# Altium PCB R45_PCBM.PcbDoc (part 4 of 8)
Units mm, origin at the board's own origin, x right, y up, seen from the top; angles counter-clockwise.
Board outline 109 x 109 mm, 4 copper layers (Top Layer, Layer 1, Layer 2, Bottom Layer), stack 0.98 mm thick; 9 components, 0 nets, 14 pads, 1504 vias.
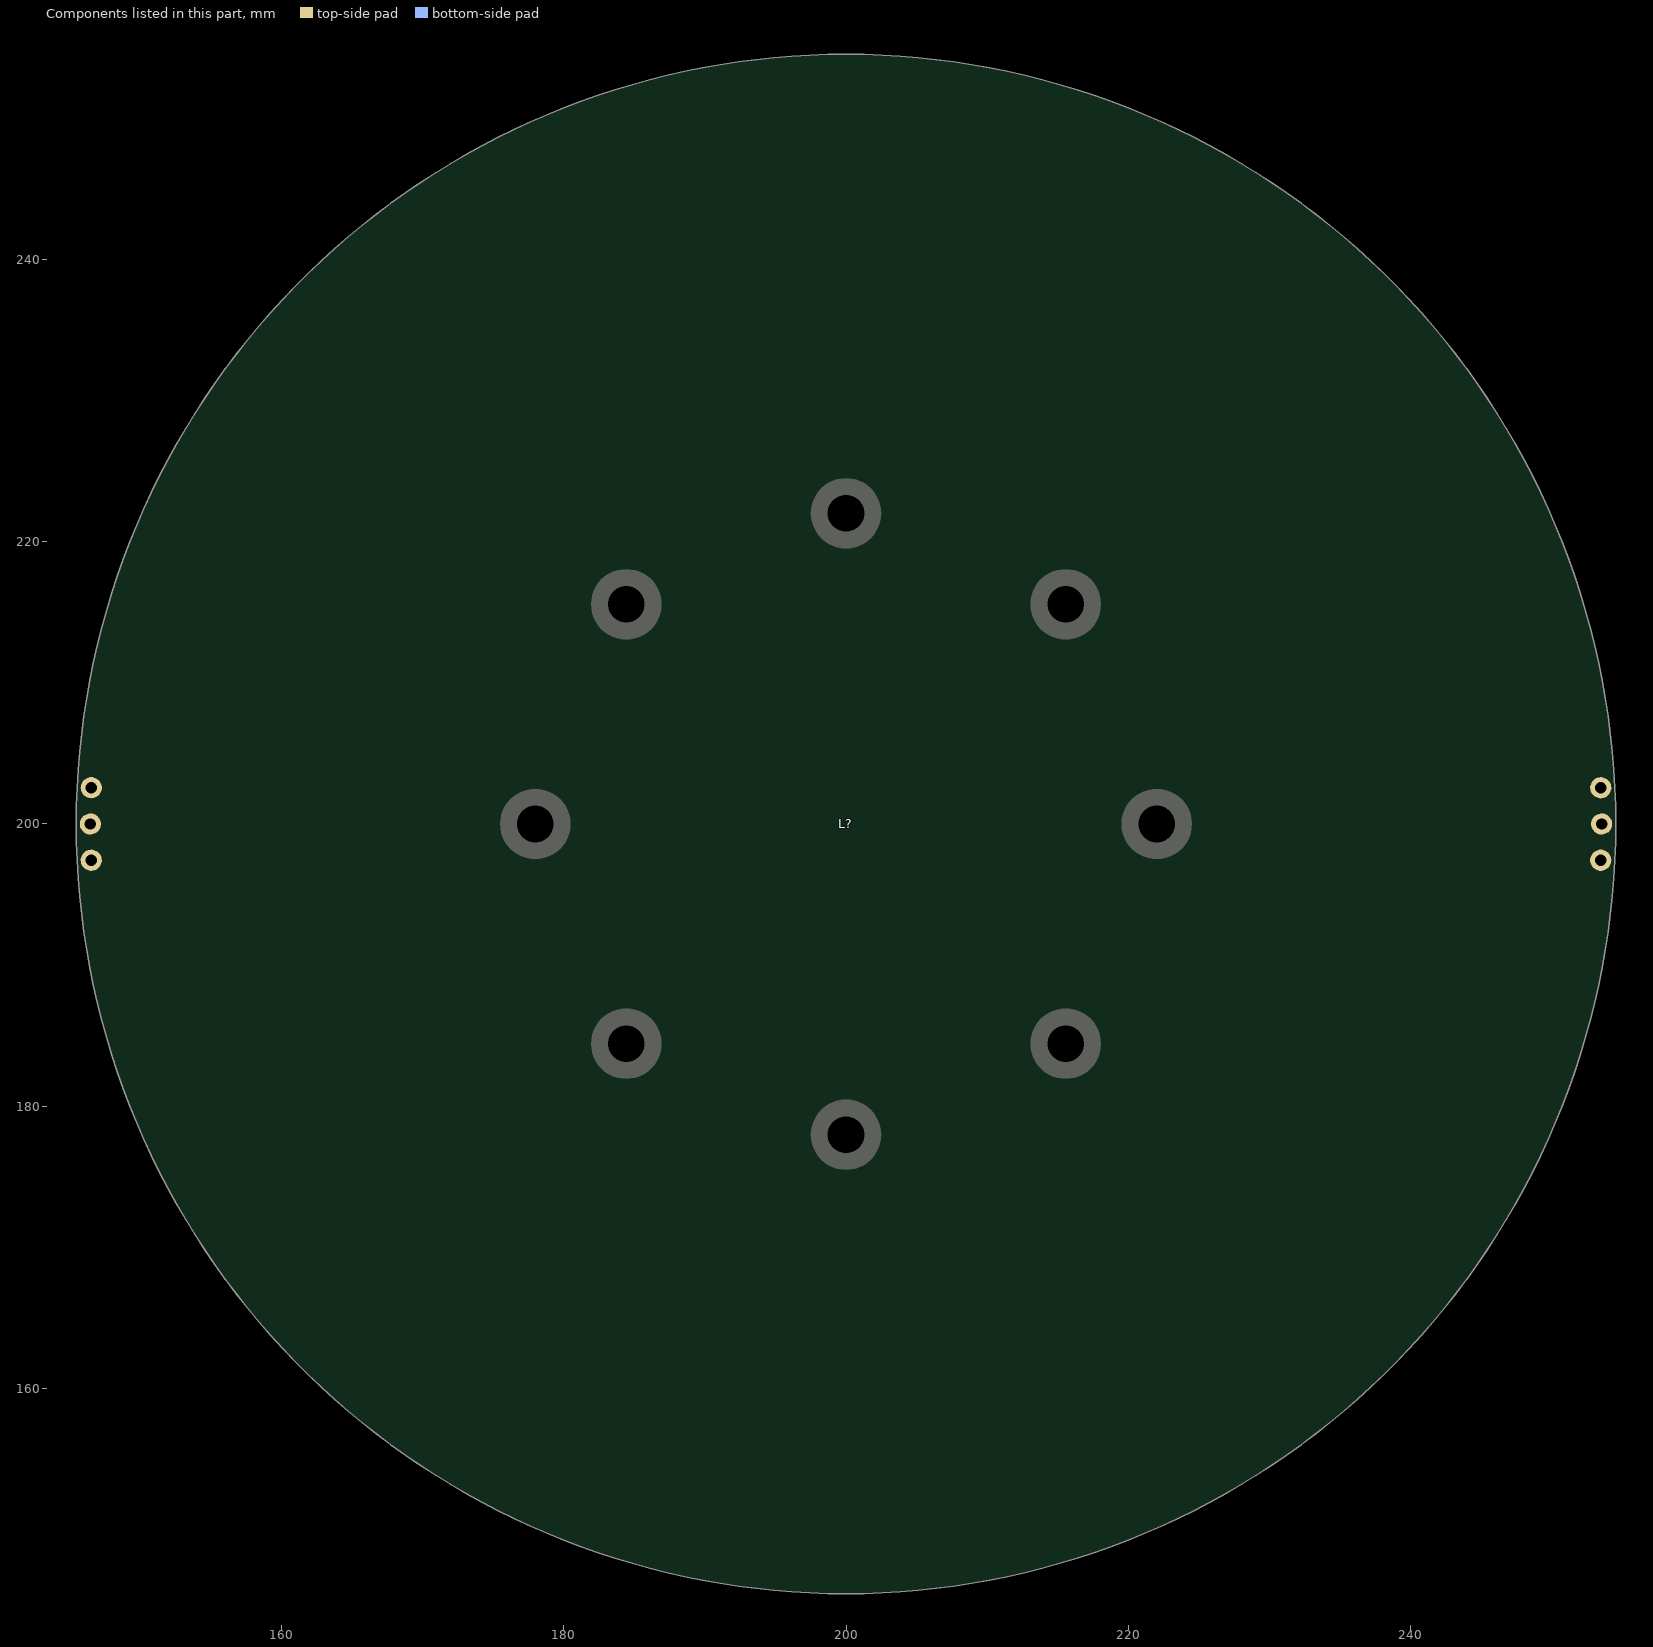
[diagram p6: the components of this part, seen from the top]

## Footprints (in the part's own frame and the unit in brackets; to place one, negate y for a bottom-side part, rotate by r counter-clockwise, add the part's x,y. Pads: shape width x height; smd on the part's side, far side on the other; paste and mask are expansions set on the pad) (continued)
R45_stator [mm] (continued)
  Layer 1 region: 2.938,-48.817 2.88,-48.809 2.829,-48.779 2.794,-48.732 2.779,-48.675 2.779,-48.675 1.645,-26.922 1.659,-26.851 1.705,-26.795 1.771,-26.766 1.771,-26.766 6.587,-26.004 6.659,-26.01 6.72,-26.05 6.755,-26.113 6.755,-26.113 11.645,-44.344 11.649,-44.403 11.63,-44.459 11.59,-44.503 11.537,-44.528 11.537,-44.528 10.718,-44.732 10.659,-44.735 10.604,-44.714 10.56,-44.674 10.536,-44.62 10.536,-44.62 6.751,-28.203 6.676,-28.037 6.543,-27.913 6.373,-27.848 6.191,-27.854 6.191,-27.854 5.987,-27.859 5.798,-27.784 5.652,-27.642 5.574,-27.453 5.574,-27.453 5.561,-27.385 5.495,-27.248 5.371,-27.161 5.22,-27.146 5.22,-27.146 3.424,-27.43 3.285,-27.491 3.194,-27.612 3.174,-27.763 3.174,-27.763 3.182,-27.832 3.166,-28.035 3.072,-28.216 2.915,-28.346 2.719,-28.404 2.719,-28.404 2.544,-28.454 2.402,-28.568 2.315,-28.728 2.295,-28.909 2.295,-28.909 3.922,-47.441 3.954,-47.554 4.028,-47.645 4.131,-47.701 4.247,-47.714 4.247,-47.714 6.667,-47.436 9.069,-47.036 9.069,-47.036 9.178,-46.992 9.261,-46.91 9.306,-46.802 9.307,-46.684 9.307,-46.684 5.79,-28.566 5.796,-28.49 5.838,-28.426 5.906,-28.391 5.906,-28.391 6.152,-28.339 6.229,-28.343 6.293,-28.384 6.329,-28.452 6.329,-28.452 10.745,-47.555 10.747,-47.614 10.726,-47.669 10.686,-47.712 10.632,-47.736 10.632,-47.736 6.806,-48.429 2.938,-48.817
  Layer 1 region: 4.511,-47.206 4.452,-47.2 4.401,-47.172 4.364,-47.126 4.347,-47.07 4.347,-47.07 2.773,-29.015 2.786,-28.94 2.835,-28.88 2.906,-28.853 2.906,-28.853 3.156,-28.827 3.232,-28.839 3.292,-28.886 3.321,-28.958 3.321,-28.958 5.399,-45.849 5.436,-45.96 5.513,-46.049 5.617,-46.101 5.734,-46.11 5.734,-46.11 6.467,-46.013 7.198,-45.904 7.198,-45.904 7.308,-45.864 7.394,-45.784 7.443,-45.678 7.447,-45.561 7.447,-45.561 4.79,-28.754 4.77,-28.699 4.73,-28.656 4.677,-28.631 4.619,-28.629 4.619,-28.629 4.454,-28.655 4.399,-28.675 4.356,-28.715 4.332,-28.768 4.33,-28.827 4.33,-28.827 6.946,-45.318 6.944,-45.377 6.919,-45.431 6.875,-45.47 6.819,-45.49 6.819,-45.49 5.984,-45.607 5.925,-45.604 5.872,-45.578 5.833,-45.533 5.814,-45.477 5.814,-45.477 3.673,-28 3.683,-27.925 3.729,-27.864 3.799,-27.834 3.799,-27.833 4.988,-27.645 5.064,-27.653 5.126,-27.696 5.159,-27.765 5.159,-27.765 8.795,-46.445 8.795,-46.503 8.772,-46.558 8.73,-46.599 8.676,-46.621 8.676,-46.621 6.6,-46.96 4.511,-47.206
  Layer 1 region: 47.272,-3.755 47.256,-3.812 47.219,-3.858 47.168,-3.886 47.109,-3.893 47.109,-3.893 29.056,-2.308 28.984,-2.282 28.934,-2.223 28.919,-2.148 28.919,-2.148 28.937,-1.898 28.962,-1.825 29.019,-1.774 29.094,-1.758 29.094,-1.758 46.09,-2.644 46.206,-2.627 46.306,-2.567 46.376,-2.473 46.405,-2.36 46.405,-2.36 46.437,-1.622 46.457,-0.883 46.457,-0.883 46.436,-0.768 46.373,-0.669 46.276,-0.602 46.162,-0.577 46.162,-0.577 29.149,-0.276 29.091,-0.286 29.042,-0.318 29.009,-0.366 28.996,-0.423 28.996,-0.423 28.993,-0.589 29.004,-0.647 29.035,-0.696 29.083,-0.73 29.141,-0.742 29.141,-0.742 45.836,-1.029 45.894,-1.041 45.942,-1.075 45.973,-1.125 45.983,-1.184 45.983,-1.184 45.954,-2.027 45.94,-2.084 45.905,-2.132 45.854,-2.163 45.796,-2.171 45.796,-2.171 28.212,-1.245 28.14,-1.222 28.088,-1.166 28.07,-1.092 28.07,-1.092 28.091,0.112 28.112,0.185 28.165,0.239 28.239,0.259 28.239,0.259 47.266,0.597 47.324,0.586 47.374,0.554 47.407,0.506 47.419,0.448 47.419,0.448 47.392,-1.655 47.272,-3.755
  Layer 1 region: 48.585,-5.584 48.567,-5.64 48.529,-5.685 48.477,-5.711 48.418,-5.716 48.418,-5.716 26.799,-3.055 26.731,-3.029 26.684,-2.974 26.667,-2.903 26.667,-2.903 26.753,1.971 26.771,2.041 26.821,2.094 26.889,2.118 26.889,2.118 45.692,3.768 45.751,3.762 45.803,3.733 45.839,3.686 45.855,3.629 45.855,3.629 45.914,2.788 45.906,2.729 45.876,2.678 45.829,2.642 45.772,2.628 45.772,2.628 28.947,1.751 28.771,1.706 28.625,1.597 28.532,1.44 28.506,1.26 28.506,1.26 28.475,1.059 28.369,0.885 28.203,0.766 28.004,0.722 28.004,0.722 27.935,0.721 27.788,0.68 27.681,0.573 27.64,0.427 27.64,0.427 27.608,-1.391 27.644,-1.539 27.748,-1.65 27.892,-1.696 27.892,-1.696 27.962,-1.699 28.159,-1.75 28.321,-1.874 28.421,-2.052 28.444,-2.254 28.444,-2.254 28.464,-2.435 28.552,-2.595 28.694,-2.709 28.868,-2.76 28.868,-2.76 47.402,-4.376 47.518,-4.363 47.621,-4.307 47.694,-4.215 47.727,-4.103 47.727,-4.103 47.873,-1.672 47.896,0.764 47.896,0.764 47.872,0.878 47.805,0.974 47.707,1.038 47.591,1.059 47.591,1.059 29.138,0.742 29.063,0.76 29.008,0.813 28.985,0.887 28.985,0.887 28.977,1.137 28.994,1.212 29.046,1.269 29.119,1.292 29.119,1.292 48.699,2.324 48.757,2.316 48.807,2.285 48.842,2.238 48.857,2.181 48.857,2.181 48.875,-1.707 48.585,-5.584
  Layer 1 region: 49.838,-9.302 49.816,-9.357 49.775,-9.399 49.721,-9.422 49.662,-9.422 49.662,-9.422 25.389,-4.697 25.326,-4.668 25.282,-4.614 25.268,-4.547 25.268,-4.547 25.411,3.662 25.428,3.729 25.473,3.781 25.537,3.808 25.537,3.808 45.318,6.946 45.377,6.944 45.431,6.919 45.47,6.875 45.49,6.819 45.49,6.819 45.607,5.984 45.604,5.925 45.578,5.872 45.533,5.833 45.477,5.814 45.477,5.814 28.754,3.766 28.582,3.709 28.444,3.59 28.362,3.427 28.348,3.246 28.348,3.246 28.332,3.042 28.238,2.862 28.081,2.732 27.886,2.674 27.886,2.674 26.575,2.56 26.437,2.513 26.338,2.406 26.301,2.266 26.301,2.266 26.206,-3.183 26.238,-3.324 26.333,-3.434 26.469,-3.486 26.469,-3.486 27.775,-3.646 27.968,-3.71 28.121,-3.845 28.209,-4.029 28.218,-4.233 28.218,-4.233 28.225,-4.415 28.301,-4.58 28.435,-4.704 28.606,-4.767 28.606,-4.767 48.651,-7.936 48.768,-7.931 48.874,-7.882 48.954,-7.796 48.994,-7.686 48.994,-7.686 49.563,-1.731 49.411,4.25 49.411,4.25 49.378,4.362 49.305,4.454 49.202,4.51 49.086,4.523 49.086,4.523 29.015,2.773 28.94,2.786 28.88,2.835 28.853,2.906 28.853,2.906 28.827,3.156 28.839,3.232 28.886,3.292 28.958,3.321 28.958,3.321 50.198,5.935 50.257,5.93 50.309,5.904 50.347,5.859 50.365,5.803 50.365,5.803 50.668,-1.769 49.838,-9.302
  Layer 1 region: 45.49,-6.819 45.607,-5.984 45.604,-5.925 45.578,-5.872 45.533,-5.833 45.477,-5.814 45.477,-5.814 28.901,-3.784 28.825,-3.794 28.764,-3.841 28.734,-3.912 28.734,-3.912 28.699,-4.16 28.708,-4.236 28.754,-4.298 28.824,-4.329 28.824,-4.329 45.318,-6.946 45.377,-6.944 45.431,-6.919 45.47,-6.875 45.49,-6.819
  Layer 1 region: 45.706,12.639 45.71,12.581 45.691,12.525 45.652,12.481 45.6,12.455 45.6,12.455 28.093,7.769 28.016,7.769 27.949,7.807 27.91,7.873 27.91,7.873 27.841,8.114 27.839,8.191 27.876,8.258 27.941,8.299 27.941,8.299 44.215,13.279 44.318,13.334 44.392,13.425 44.426,13.537 44.414,13.654 44.414,13.654 44.191,14.358 43.957,15.059 43.957,15.059 43.898,15.161 43.805,15.232 43.692,15.262 43.576,15.246 43.576,15.246 27.485,9.711 27.435,9.681 27.399,9.635 27.384,9.578 27.392,9.52 27.392,9.52 27.446,9.362 27.476,9.312 27.522,9.276 27.579,9.262 27.637,9.269 27.637,9.269 43.423,14.71 43.482,14.718 43.539,14.703 43.586,14.666 43.615,14.615 43.615,14.615 43.875,13.813 43.882,13.754 43.866,13.697 43.829,13.651 43.777,13.623 43.777,13.623 26.937,8.48 26.861,8.476 26.793,8.511 26.751,8.574 26.751,8.574 26.359,9.713 26.353,9.789 26.385,9.858 26.447,9.902 26.447,9.902 44.212,16.727 44.27,16.737 44.327,16.724 44.375,16.689 44.406,16.639 44.406,16.639 45.1,14.654 45.706,12.639
  Layer 1 region: 47.565,11.37 47.567,11.311 47.547,11.256 47.507,11.213 47.453,11.189 47.453,11.189 26.228,6.295 26.155,6.296 26.092,6.332 26.052,6.393 26.052,6.393 24.465,11.002 24.459,11.074 24.487,11.141 24.543,11.187 24.543,11.187 41.648,19.169 41.705,19.182 41.764,19.173 41.814,19.142 41.848,19.094 41.848,19.094 42.191,18.323 42.204,18.265 42.194,18.207 42.162,18.158 42.113,18.124 42.113,18.124 26.603,11.546 26.452,11.443 26.352,11.291 26.318,11.112 26.355,10.934 26.355,10.934 26.396,10.734 26.356,10.534 26.24,10.366 26.068,10.257 26.068,10.257 26.003,10.232 25.88,10.143 25.815,10.006 25.827,9.854 25.827,9.854 26.419,8.136 26.503,8.009 26.638,7.94 26.79,7.946 26.79,7.946 26.857,7.967 27.06,7.986 27.254,7.925 27.409,7.793 27.5,7.61 27.5,7.61 27.58,7.447 27.717,7.327 27.89,7.268 28.071,7.28 28.071,7.28 46.04,12.1 46.145,12.152 46.222,12.24 46.259,12.351 46.252,12.468 46.252,12.468 45.558,14.803 44.747,17.099 44.747,17.099 44.684,17.198 44.589,17.266 44.475,17.292 44.359,17.272 44.359,17.272 27.127,10.663 27.051,10.655 26.98,10.685 26.934,10.747 26.934,10.747 26.84,10.979 26.831,11.056 26.86,11.127 26.921,11.174 26.921,11.174 44.967,18.84 45.025,18.852 45.082,18.841 45.131,18.808 45.164,18.759 45.164,18.759 46.512,15.113 47.565,11.37
  Layer 1 region: 50.014,8.304 50.012,8.246 49.987,8.192 49.944,8.152 49.889,8.132 49.889,8.132 25.464,4.27 25.395,4.275 25.336,4.311 25.299,4.37 25.299,4.37 22.626,12.132 22.619,12.201 22.644,12.266 22.695,12.312 22.695,12.312 40.209,22.027 40.266,22.045 40.325,22.04 40.377,22.012 40.414,21.966 40.414,21.966 40.81,21.222 40.827,21.165 40.821,21.106 40.792,21.054 40.746,21.018 40.746,21.018 25.732,13.373 25.589,13.26 25.5,13.102 25.479,12.921 25.529,12.745 25.529,12.745 25.583,12.549 25.557,12.347 25.453,12.171 25.289,12.05 25.289,12.05 24.096,11.494 23.984,11.403 23.927,11.269 23.939,11.125 23.939,11.125 25.714,5.972 25.793,5.85 25.92,5.78 26.065,5.777 26.065,5.777 27.347,6.074 27.551,6.079 27.74,6.005 27.886,5.862 27.964,5.673 27.964,5.673 28.033,5.505 28.161,5.376 28.329,5.305 28.511,5.304 28.511,5.304 48.431,9.182 48.54,9.227 48.623,9.309 48.668,9.417 48.668,9.534 48.668,9.534 47.166,15.325 44.978,20.893 44.978,20.893 44.908,20.988 44.808,21.048 44.693,21.066 44.579,21.039 44.579,21.039 26.317,12.529 26.241,12.516 26.169,12.541 26.119,12.599 26.119,12.599 26.009,12.825 25.994,12.9 26.018,12.973 26.076,13.024 26.076,13.024 45.141,22.745 45.198,22.761 45.256,22.754 45.307,22.725 45.343,22.679 45.343,22.679 48.217,15.667 50.014,8.304
  Layer 1 region: 45.079,9.151 44.904,9.976 44.88,10.03 44.837,10.071 44.782,10.092 44.723,10.091 44.723,10.091 28.452,6.329 28.384,6.293 28.343,6.229 28.339,6.152 28.339,6.152 28.391,5.906 28.426,5.838 28.49,5.796 28.566,5.79 28.566,5.79 44.961,8.972 45.016,8.995 45.057,9.037 45.08,9.092 45.079,9.151
  Layer 1 region: 40.414,-21.966 40.81,-21.222 40.827,-21.165 40.821,-21.106 40.792,-21.054 40.746,-21.018 40.746,-21.018 25.864,-13.44 25.789,-13.424 25.715,-13.447 25.663,-13.503 25.663,-13.503 25.545,-13.725 25.528,-13.8 25.55,-13.873 25.605,-13.926 25.605,-13.926 40.209,-22.027 40.266,-22.045 40.325,-22.04 40.377,-22.012 40.414,-21.966
  Layer 1 region: 43.651,-25.787 43.612,-25.83 43.558,-25.856 43.5,-25.859 43.444,-25.839 43.444,-25.839 22.251,-13.097 22.202,-13.048 22.179,-12.983 22.189,-12.914 22.189,-12.914 25.131,-5.25 25.17,-5.193 25.23,-5.159 25.3,-5.156 25.299,-5.156 44.961,-8.972 45.016,-8.995 45.057,-9.037 45.08,-9.092 45.079,-9.151 45.079,-9.151 44.904,-9.976 44.88,-10.03 44.837,-10.071 44.782,-10.092 44.723,-10.091 44.723,-10.091 28.308,-6.296 28.126,-6.29 27.956,-6.355 27.823,-6.48 27.749,-6.646 27.749,-6.646 27.664,-6.831 27.514,-6.969 27.322,-7.037 27.118,-7.025 27.118,-7.025 25.847,-6.684 25.702,-6.681 25.573,-6.747 25.49,-6.866 25.49,-6.866 23.537,-11.954 23.519,-12.098 23.571,-12.233 23.681,-12.328 23.681,-12.328 24.853,-12.926 25.013,-13.052 25.11,-13.231 25.13,-13.434 25.068,-13.629 25.068,-13.629 25.013,-13.802 25.028,-13.984 25.111,-14.145 25.25,-14.263 25.25,-14.263 43.003,-24.097 43.114,-24.133 43.231,-24.123 43.335,-24.069 43.411,-23.98 43.411,-23.98 45.982,-18.578 47.885,-12.906 47.885,-12.906 47.892,-12.789 47.855,-12.678 47.778,-12.59 47.673,-12.538 47.673,-12.538 28.214,-7.318 28.147,-7.28 28.108,-7.214 28.107,-7.137 28.107,-7.137 28.168,-6.894 28.205,-6.826 28.27,-6.786 28.347,-6.784 28.347,-6.784 49.2,-11.592 49.254,-11.616 49.294,-11.659 49.315,-11.714 49.313,-11.773 49.313,-11.773 47.007,-18.992 43.651,-25.787
  Layer 1 region: 43.746,-21.864 43.709,-21.911 43.658,-21.94 43.6,-21.947 43.543,-21.931 43.543,-21.931 24.138,-12.036 24.083,-11.989 24.057,-11.921 24.066,-11.849 24.066,-11.849 25.813,-7.298 25.855,-7.238 25.92,-7.205 25.992,-7.207 25.992,-7.207 44.225,-12.087 44.278,-12.113 44.317,-12.158 44.336,-12.214 44.331,-12.273 44.331,-12.273 44.098,-13.084 44.071,-13.136 44.026,-13.174 43.969,-13.192 43.91,-13.186 43.91,-13.186 27.8,-8.255 27.619,-8.237 27.445,-8.29 27.304,-8.405 27.217,-8.565 27.217,-8.565 27.12,-8.744 26.961,-8.871 26.764,-8.926 26.562,-8.899 26.562,-8.899 26.497,-8.876 26.345,-8.865 26.207,-8.929 26.119,-9.053 26.119,-9.053 25.467,-10.749 25.451,-10.9 25.51,-11.04 25.63,-11.133 25.63,-11.133 25.694,-11.16 25.862,-11.276 25.972,-11.448 26.005,-11.649 25.958,-11.847 25.958,-11.847 25.915,-12.024 25.942,-12.204 26.037,-12.359 26.183,-12.467 26.183,-12.467 43.046,-20.324 43.16,-20.352 43.276,-20.334 43.376,-20.273 43.445,-20.179 43.445,-20.179 44.414,-17.945 45.269,-15.664 45.269,-15.664 45.285,-15.548 45.255,-15.435 45.185,-15.341 45.083,-15.282 45.083,-15.282 27.634,-9.269 27.571,-9.226 27.536,-9.157 27.541,-9.08 27.541,-9.08 27.618,-8.842 27.66,-8.777 27.728,-8.742 27.805,-8.745 27.805,-8.745 46.557,-14.472 46.609,-14.5 46.646,-14.546 46.662,-14.602 46.656,-14.66 46.656,-14.66 45.344,-18.32 43.746,-21.864
  Layer 1 region: 43.137,-19.697 43.103,-19.744 43.052,-19.775 42.994,-19.784 42.937,-19.77 42.937,-19.77 26.514,-12.106 26.455,-12.057 26.428,-11.985 26.441,-11.909 26.441,-11.909 26.543,-11.68 26.591,-11.62 26.662,-11.592 26.738,-11.603 26.738,-11.603 42.406,-18.248 42.521,-18.272 42.636,-18.25 42.734,-18.186 42.799,-18.089 42.799,-18.089 43.082,-17.406 43.353,-16.719 43.353,-16.719 43.373,-16.603 43.347,-16.489 43.28,-16.393 43.181,-16.331 43.181,-16.331 27.297,-10.228 27.239,-10.218 27.182,-10.231 27.134,-10.265 27.103,-10.315 27.103,-10.315 27.043,-10.47 27.033,-10.528 27.046,-10.585 27.08,-10.633 27.129,-10.664 27.129,-10.664 42.72,-16.643 42.77,-16.675 42.804,-16.724 42.816,-16.781 42.805,-16.84 42.805,-16.84 42.489,-17.622 42.457,-17.671 42.407,-17.704 42.349,-17.715 42.291,-17.703 42.291,-17.703 26.085,-10.819 26.025,-10.772 25.995,-10.703 26.004,-10.627 26.004,-10.627 26.435,-9.503 26.48,-9.441 26.549,-9.409 26.624,-9.414 26.624,-9.414 44.62,-15.605 44.671,-15.635 44.706,-15.682 44.721,-15.739 44.713,-15.797 44.713,-15.797 43.968,-17.764 43.137,-19.697
  Layer 1 region: 19.094,41.848 18.323,42.191 18.265,42.204 18.207,42.194 18.158,42.162 18.124,42.113 18.124,42.113 11.603,26.738 11.592,26.662 11.62,26.591 11.68,26.543 11.68,26.543 11.909,26.441 11.985,26.428 12.057,26.455 12.106,26.514 12.106,26.514 19.169,41.648 19.182,41.705 19.173,41.764 19.142,41.814 19.094,41.848
  Layer 1 region: 3.629,45.855 2.788,45.914 2.729,45.906 2.678,45.876 2.642,45.829 2.628,45.772 2.628,45.772 1.758,29.094 1.774,29.019 1.825,28.962 1.898,28.937 1.898,28.937 2.148,28.919 2.223,28.934 2.282,28.984 2.308,29.056 2.308,29.056 3.768,45.692 3.762,45.751 3.733,45.803 3.686,45.839 3.629,45.855
  Layer 1 region: 16.128,43.078 15.335,43.367 15.277,43.376 15.22,43.361 15.172,43.326 15.142,43.275 15.142,43.275 9.662,27.343 9.57,27.186 9.425,27.076 9.249,27.029 9.069,27.054 9.069,27.054 8.867,27.081 8.67,27.026 8.511,26.899 8.413,26.72 8.413,26.72 8.029,25.462 7.954,25.337 7.83,25.262 7.685,25.255 7.685,25.255 2.335,26.295 2.204,26.356 2.116,26.472 2.094,26.615 2.094,26.615 2.209,27.926 2.186,28.129 2.085,28.306 1.924,28.43 1.726,28.481 1.726,28.481 1.55,28.526 1.404,28.635 1.311,28.791 1.285,28.972 1.285,28.972 2.171,45.796 2.163,45.854 2.132,45.905 2.084,45.94 2.027,45.954 2.027,45.954 1.184,45.983 1.125,45.973 1.075,45.942 1.041,45.894 1.029,45.836 1.029,45.836 0.685,25.811 0.7,25.743 0.743,25.689 0.806,25.661 0.806,25.661 8.865,24.094 8.934,24.097 8.995,24.131 9.034,24.188 9.034,24.188 16.217,42.884 16.227,42.942 16.213,43 16.178,43.047 16.128,43.078
  Layer 1 region: 13.084,44.098 12.273,44.331 12.214,44.336 12.158,44.317 12.113,44.278 12.087,44.225 12.087,44.225 7.731,27.951 7.65,27.787 7.513,27.667 7.341,27.609 7.159,27.621 7.159,27.621 6.956,27.633 6.764,27.565 6.614,27.427 6.529,27.242 6.529,27.242 6.513,27.174 6.443,27.04 6.315,26.957 6.164,26.947 6.164,26.947 4.38,27.294 4.243,27.36 4.155,27.484 4.141,27.635 4.141,27.635 4.151,27.704 4.143,27.908 4.055,28.092 3.902,28.227 3.709,28.291 3.709,28.291 3.536,28.348 3.398,28.467 3.316,28.63 3.303,28.811 3.303,28.811 5.36,45.533 5.356,45.592 5.329,45.645 5.284,45.683 5.227,45.7 5.227,45.7 4.389,45.789 4.33,45.783 4.277,45.755 4.24,45.709 4.223,45.652 4.223,45.652 2.584,26.849 2.595,26.777 2.639,26.719 2.705,26.688 2.705,26.688 7.49,25.758 7.563,25.762 7.625,25.799 7.662,25.861 7.662,25.861 13.186,43.91 13.192,43.969 13.174,44.026 13.136,44.071 13.084,44.098
  Layer 1 region: 6.819,45.49 5.984,45.607 5.925,45.604 5.872,45.578 5.833,45.533 5.814,45.477 5.814,45.477 3.784,28.901 3.794,28.825 3.841,28.764 3.912,28.734 3.912,28.734 4.16,28.699 4.236,28.708 4.298,28.754 4.329,28.824 4.329,28.824 6.946,45.318 6.944,45.377 6.919,45.431 6.875,45.47 6.819,45.49
  Layer 1 region: 9.151,45.079 9.092,45.08 9.037,45.057 8.995,45.016 8.972,44.961 8.972,44.961 5.791,28.569 5.769,28.515 5.728,28.473 5.674,28.451 5.615,28.45 5.615,28.45 5.452,28.482 5.397,28.504 5.356,28.546 5.333,28.6 5.333,28.658 5.333,28.658 8.524,45.048 8.523,45.107 8.5,45.162 8.458,45.203 8.402,45.224 8.402,45.224 7.572,45.371 7.513,45.369 7.459,45.345 7.418,45.302 7.398,45.247 7.398,45.247 4.648,27.855 4.656,27.779 4.699,27.717 4.768,27.684 4.768,27.684 5.95,27.454 6.026,27.459 6.09,27.5 6.125,27.568 6.125,27.568 10.091,44.723 10.092,44.782 10.071,44.837 10.03,44.88 9.976,44.904 9.976,44.904
  Layer 1 region: 11.537,44.528 10.718,44.732 10.659,44.735 10.604,44.714 10.56,44.674 10.536,44.62 10.536,44.62 6.784,28.347 6.786,28.27 6.826,28.205 6.894,28.168 6.894,28.168 7.137,28.107 7.214,28.108 7.28,28.147 7.318,28.214 7.318,28.214 11.645,44.344 11.649,44.403 11.63,44.459 11.59,44.503 11.537,44.528
  Layer 1 region: 14.615,43.615 13.813,43.875 13.754,43.882 13.697,43.866 13.651,43.829 13.623,43.777 13.623,43.777 8.745,27.805 8.742,27.728 8.777,27.66 8.842,27.618 8.842,27.618 9.08,27.541 9.157,27.536 9.226,27.571 9.269,27.634 9.269,27.634 14.71,43.423 14.718,43.482 14.703,43.539 14.666,43.586 14.615,43.615
  Layer 1 region: 29.889,34.964 29.243,35.506 29.191,35.535 29.132,35.541 29.075,35.524 29.03,35.486 29.03,35.486 18.431,22.39 18.291,22.273 18.117,22.219 17.936,22.236 17.775,22.321 17.775,22.321 17.594,22.415 17.391,22.431 17.197,22.366 17.045,22.231 17.045,22.231 16.253,21.18 16.14,21.089 15.998,21.061 15.859,21.103 15.859,21.103 11.188,23.91 11.085,24.013 11.043,24.152 11.07,24.294 11.07,24.294 11.627,25.487 11.675,25.685 11.641,25.886 11.531,26.058 11.363,26.173 11.363,26.173 11.213,26.276 11.113,26.428 11.079,26.607 11.116,26.785 11.116,26.785 17.703,42.291 17.715,42.349 17.704,42.407 17.671,42.457 17.622,42.489 17.622,42.489 16.84,42.805 16.781,42.816 16.724,42.804 16.675,42.77 16.643,42.72 16.643,42.72 9.471,24.02 9.462,23.951 9.485,23.886 9.534,23.837 9.534,23.837 16.571,19.609 16.637,19.588 16.706,19.599 16.762,19.639 16.762,19.639 29.906,34.751 29.935,34.802 29.942,34.861 29.926,34.918 29.889,34.964
  Layer 1 region: 27.377,36.964 26.695,37.46 26.641,37.484 26.582,37.486 26.527,37.465 26.484,37.424 26.484,37.424 16.824,23.621 16.693,23.495 16.523,23.429 16.341,23.433 16.174,23.506 16.174,23.506 15.987,23.588 15.784,23.589 15.595,23.511 15.453,23.366 15.453,23.366 15.415,23.308 15.302,23.205 15.154,23.171 15.009,23.214 15.009,23.214 13.45,24.15 13.344,24.259 13.305,24.405 13.343,24.553 13.343,24.553 13.376,24.614 13.438,24.808 13.418,25.011 13.321,25.19 13.161,25.317 13.161,25.317 13.018,25.429 12.929,25.588 12.908,25.769 12.957,25.944 12.957,25.944 20.61,40.954 20.626,41.01 20.619,41.069 20.59,41.121 20.542,41.156 20.542,41.156 19.785,41.526 19.727,41.541 19.669,41.533 19.618,41.502 19.583,41.455 19.583,41.455 11.611,24.346 11.597,24.275 11.618,24.205 11.669,24.154 11.669,24.154 15.848,21.643 15.918,21.622 15.989,21.636 16.045,21.681 16.045,21.681 27.409,36.752 27.434,36.806 27.437,36.865 27.417,36.92 27.377,36.964
  Layer 1 region: 24.017,39.231 23.961,39.251 23.902,39.249 23.849,39.224 23.809,39.181 23.809,39.181 15.213,24.866 15.173,24.822 15.121,24.797 15.062,24.794 15.007,24.814 15.007,24.814 14.864,24.9 14.821,24.939 14.796,24.992 14.793,25.051 14.813,25.106 14.813,25.106 23.417,39.416 23.437,39.472 23.434,39.531 23.408,39.584 23.363,39.623 23.363,39.623 22.633,40.045 22.577,40.064 22.518,40.06 22.465,40.033 22.427,39.988 22.427,39.988 13.895,24.585 13.876,24.511 13.896,24.438 13.949,24.384 13.949,24.384 14.981,23.763 15.054,23.742 15.128,23.759 15.184,23.81 15.184,23.81 24.778,38.575 24.8,38.63 24.799,38.689 24.775,38.743 24.732,38.784 24.732,38.784
  Layer 1 region: 26.07,37.897 25.371,38.369 25.317,38.391 25.258,38.391 25.203,38.368 25.162,38.326 25.162,38.326 16.07,24.317 16.046,24.244 16.061,24.169 16.112,24.111 16.112,24.111 16.32,23.971 16.392,23.946 16.468,23.96 16.527,24.009 16.527,24.009 26.109,37.687 26.133,37.741 26.134,37.8 26.112,37.855 26.07,37.897
  Layer 1 region: 21.966,40.414 21.222,40.81 21.165,40.827 21.106,40.821 21.054,40.792 21.018,40.746 21.018,40.746 13.44,25.864 13.424,25.789 13.447,25.715 13.503,25.663 13.503,25.663 13.725,25.545 13.8,25.528 13.873,25.55 13.926,25.605 13.926,25.605 22.027,40.209 22.045,40.266 22.04,40.325 22.012,40.377 21.966,40.414
  Layer 1 region: 28.65,35.986 27.986,36.505 27.933,36.532 27.874,36.536 27.818,36.517 27.774,36.477 27.774,36.477 17.727,23.137 17.698,23.066 17.708,22.99 17.755,22.929 17.755,22.929 17.952,22.774 18.023,22.744 18.099,22.753 18.161,22.798 18.161,22.798 28.675,35.773 28.702,35.826 28.707,35.885 28.689,35.941 28.65,35.986
  Layer 1 region: 39.231,24.017 38.784,24.732 38.743,24.775 38.689,24.799 38.63,24.8 38.575,24.778 38.575,24.778 24.571,15.679 24.52,15.622 24.503,15.547 24.526,15.473 24.526,15.473 24.659,15.261 24.715,15.208 24.789,15.19 24.863,15.211 24.863,15.211 39.181,23.809 39.224,23.849 39.249,23.902 39.251,23.961 39.231,24.017
  Layer 1 region: 40.045,22.633 39.623,23.363 39.584,23.408 39.531,23.434 39.472,23.437 39.416,23.417 39.416,23.417 24.977,14.736 24.806,14.674 24.624,14.683 24.459,14.761 24.337,14.895 24.337,14.895 24.199,15.046 24.014,15.13 23.81,15.136 23.62,15.061 23.62,15.061 22.517,14.344 22.38,14.296 22.236,14.319 22.12,14.406 22.12,14.406 18.691,18.642 18.629,18.773 18.637,18.918 18.712,19.043 18.712,19.043 19.643,19.973 19.755,20.143 19.792,20.343 19.748,20.542 19.63,20.708 19.63,20.708 19.523,20.856 19.482,21.033 19.511,21.213 19.607,21.368 19.607,21.368 31.1,33.686 31.131,33.736 31.14,33.795 31.126,33.852 31.091,33.9 31.091,33.9 30.464,34.464 30.413,34.494 30.355,34.502 30.298,34.487 30.251,34.451 30.251,34.451 17.115,19.332 17.083,19.271 17.082,19.201 17.112,19.139 17.112,19.139 22.279,12.759 22.333,12.716 22.401,12.703 22.468,12.722 22.468,12.722 39.988,22.427 40.033,22.465 40.06,22.518 40.064,22.577 40.045,22.633
  Layer 1 region: 38.369,25.371 37.897,26.07 37.855,26.112 37.8,26.134 37.741,26.133 37.687,26.109 37.687,26.109 23.888,16.442 23.722,16.369 23.54,16.365 23.37,16.431 23.239,16.557 23.239,16.557 23.091,16.697 22.9,16.768 22.696,16.76 22.512,16.672 22.512,16.672 22.457,16.63 22.316,16.572 22.165,16.591 22.043,16.681 22.043,16.681 20.899,18.093 20.836,18.232 20.85,18.383 20.935,18.508 20.935,18.508 20.988,18.554 21.112,18.716 21.163,18.913 21.133,19.115 21.027,19.288 21.027,19.288 20.931,19.443 20.901,19.623 20.943,19.8 21.049,19.948 21.049,19.948 33.374,31.435 33.409,31.483 33.422,31.54 33.412,31.599 33.38,31.648 33.38,31.648 32.794,32.255 32.745,32.289 32.688,32.301 32.629,32.29 32.58,32.257 32.58,32.257 19.237,18.906 19.2,18.844 19.196,18.772 19.227,18.706 19.227,18.706 22.295,14.917 22.353,14.874 22.424,14.862 22.493,14.886 22.493,14.886 38.326,25.162 38.368,25.203 38.391,25.257 38.391,25.317 38.369,25.371
  Layer 1 region: 37.46,26.695 36.964,27.377 36.92,27.417 36.865,27.437 36.806,27.434 36.752,27.409 36.752,27.409 23.418,17.354 23.37,17.294 23.359,17.218 23.387,17.147 23.387,17.147 23.534,16.944 23.594,16.895 23.669,16.882 23.742,16.909 23.742,16.909 37.424,26.484 37.465,26.527 37.486,26.582 37.484,26.641 37.46,26.695
  Layer 1 region: 35.986,28.65 35.941,28.689 35.885,28.707 35.826,28.702 35.773,28.675 35.773,28.675 22.8,18.163 22.748,18.136 22.69,18.13 22.634,18.148 22.589,18.185 22.589,18.185 22.484,18.314 22.457,18.366 22.451,18.425 22.469,18.48 22.506,18.525 22.506,18.525 35.486,29.03 35.524,29.075 35.541,29.132 35.535,29.191 35.506,29.243 35.506,29.243 34.964,29.889 34.918,29.926 34.861,29.942 34.802,29.935 34.751,29.906 34.751,29.906 21.465,18.35 21.423,18.287 21.416,18.212 21.447,18.143 21.447,18.143 22.205,17.206 22.266,17.161 22.342,17.152 22.412,17.181 22.412,17.181 36.477,27.774 36.517,27.818 36.536,27.874 36.532,27.933 36.505,27.986 36.505,27.986
  Layer 1 region: 34.464,30.464 33.9,31.091 33.852,31.126 33.795,31.14 33.736,31.131 33.686,31.1 33.686,31.1 21.475,19.707 21.435,19.642 21.431,19.565 21.466,19.497 21.466,19.497 21.634,19.311 21.698,19.269 21.775,19.264 21.844,19.298 21.844,19.298 34.451,30.251 34.487,30.298 34.502,30.355 34.494,30.413 34.464,30.464
  Layer 1 region: 32.255,32.794 31.648,33.38 31.599,33.412 31.54,33.422 31.483,33.409 31.435,33.374 31.435,33.374 20.048,21.157 20.012,21.09 20.014,21.013 20.054,20.947 20.054,20.947 20.234,20.773 20.302,20.735 20.378,20.736 20.445,20.775 20.445,20.775 32.257,32.58 32.29,32.629 32.301,32.688 32.289,32.745 32.255,32.794
  Layer 1 region: -45.371,-7.572 -45.224,-8.402 -45.203,-8.458 -45.162,-8.5 -45.107,-8.523 -45.048,-8.524 -45.048,-8.524 -28.655,-5.332 -28.586,-5.299 -28.543,-5.236 -28.536,-5.159 -28.536,-5.159 -28.58,-4.912 -28.612,-4.842 -28.675,-4.798 -28.751,-4.79 -28.751,-4.79 -45.247,-7.398 -45.302,-7.418 -45.345,-7.459 -45.369,-7.513 -45.371,-7.572
  Layer 1 region: -45.607,-5.984 -45.604,-5.925 -45.578,-5.872 -45.533,-5.833 -45.477,-5.814 -45.477,-5.814 -28.901,-3.784 -28.825,-3.794 -28.764,-3.841 -28.734,-3.912 -28.734,-3.912 -28.699,-4.16 -28.708,-4.236 -28.754,-4.298 -28.824,-4.329 -28.824,-4.329 -45.318,-6.946 -45.377,-6.944 -45.431,-6.919 -45.47,-6.875 -45.49,-6.819 -45.49,-6.819
  Layer 1 region: -40.81,-21.222 -40.827,-21.165 -40.821,-21.106 -40.792,-21.054 -40.746,-21.018 -40.746,-21.018 -25.864,-13.44 -25.789,-13.424 -25.715,-13.447 -25.663,-13.503 -25.663,-13.503 -25.545,-13.725 -25.528,-13.8 -25.55,-13.873 -25.605,-13.926 -25.605,-13.926 -40.209,-22.027 -40.266,-22.045 -40.325,-22.04 -40.377,-22.012 -40.414,-21.966 -40.414,-21.966
  Layer 1 region: -46.224,-11.061 -46.226,-11.002 -46.206,-10.947 -46.165,-10.904 -46.112,-10.88 -46.112,-10.88 -28.347,-6.784 -28.27,-6.786 -28.205,-6.826 -28.168,-6.894 -28.168,-6.894 -28.107,-7.137 -28.108,-7.214 -28.147,-7.28 -28.214,-7.318 -28.214,-7.318 -44.714,-11.744 -44.819,-11.796 -44.896,-11.884 -44.933,-11.995 -44.926,-12.112 -44.926,-12.112 -44.252,-14.378 -43.465,-16.607 -43.465,-16.607 -43.403,-16.707 -43.307,-16.774 -43.193,-16.8 -43.077,-16.781 -43.077,-16.781 -26.848,-10.556 -26.725,-10.467 -26.66,-10.33 -26.672,-10.178 -26.672,-10.178 -27.284,-8.4 -27.368,-8.274 -27.504,-8.205 -27.656,-8.211 -27.656,-8.211 -43.91,-13.186 -43.969,-13.192 -44.026,-13.174 -44.071,-13.136 -44.098,-13.084 -44.098,-13.084 -44.331,-12.273 -44.336,-12.214 -44.317,-12.158 -44.278,-12.113 -44.225,-12.087 -44.225,-12.087 -26.801,-7.423 -26.727,-7.422 -26.662,-7.457 -26.621,-7.519 -26.621,-7.519 -25.607,-10.464 -25.601,-10.538 -25.631,-10.606 -25.69,-10.651 -25.69,-10.651 -43.7,-18.302 -43.758,-18.314 -43.816,-18.303 -43.865,-18.27 -43.897,-18.221 -43.897,-18.221 -45.203,-14.687 -46.224,-11.061
  Layer 1 region: -48.102,-9.736 -48.102,-9.677 -48.079,-9.623 -48.038,-9.581 -47.983,-9.559 -47.983,-9.559 -26.07,-5.306 -25.999,-5.309 -25.937,-5.345 -25.899,-5.404 -25.899,-5.404 -23.736,-11.687 -23.729,-11.757 -23.756,-11.823 -23.81,-11.869 -23.81,-11.869 -40.954,-20.61 -41.01,-20.626 -41.069,-20.619 -41.121,-20.59 -41.156,-20.542 -41.156,-20.542 -41.526,-19.785 -41.541,-19.727 -41.533,-19.669 -41.502,-19.618 -41.455,-19.583 -41.455,-19.583 -26.183,-12.467 -26.037,-12.359 -25.942,-12.204 -25.915,-12.024 -25.958,-11.847 -25.958,-11.847 -26.005,-11.649 -25.972,-11.448 -25.862,-11.276 -25.694,-11.16 -25.694,-11.16 -25.245,-10.97 -25.127,-10.88 -25.066,-10.744 -25.078,-10.596 -25.078,-10.596 -26.285,-7.09 -26.367,-6.966 -26.498,-6.896 -26.647,-6.898 -26.647,-6.898 -27.118,-7.025 -27.322,-7.037 -27.514,-6.969 -27.664,-6.831 -27.749,-6.646 -27.749,-6.646 -27.823,-6.48 -27.956,-6.355 -28.126,-6.29 -28.308,-6.296 -28.308,-6.296 -46.556,-10.514 -46.662,-10.562 -46.743,-10.648 -46.784,-10.757 -46.78,-10.874 -46.78,-10.874 -45.677,-14.841 -44.238,-18.699 -44.238,-18.699 -44.172,-18.796 -44.074,-18.86 -43.959,-18.882 -43.844,-18.859 -43.844,-18.859 -26.738,-11.603 -26.662,-11.592 -26.591,-11.62 -26.543,-11.68 -26.543,-11.68 -26.441,-11.909 -26.428,-11.985 -26.455,-12.057 -26.514,-12.106 -26.514,-12.106 -44.438,-20.47 -44.495,-20.484 -44.553,-20.475 -44.603,-20.445 -44.638,-20.397 -44.638,-20.397 -46.675,-15.166 -48.102,-9.736
  Layer 1 region: -43.367,-15.335 -43.078,-16.128 -43.047,-16.178 -43,-16.213 -42.942,-16.227 -42.884,-16.217 -42.884,-16.217 -27.294,-10.227 -27.232,-10.182 -27.2,-10.113 -27.207,-10.036 -27.207,-10.036 -27.293,-9.8 -27.337,-9.737 -27.406,-9.704 -27.483,-9.71 -27.483,-9.71 -43.275,-15.142 -43.326,-15.172 -43.361,-15.22 -43.376,-15.277 -43.367,-15.335
  Layer 1 region: -43.875,-13.813 -43.615,-14.615 -43.586,-14.666 -43.539,-14.703 -43.482,-14.718 -43.423,-14.71 -43.423,-14.71 -27.634,-9.269 -27.571,-9.226 -27.536,-9.157 -27.541,-9.08 -27.541,-9.08 -27.618,-8.842 -27.66,-8.777 -27.728,-8.742 -27.805,-8.745 -27.805,-8.745 -43.777,-13.623 -43.829,-13.651 -43.866,-13.697 -43.882,-13.754 -43.875,-13.813
  Layer 1 region: -45.954,2.027 -45.983,1.184 -45.973,1.125 -45.942,1.075 -45.894,1.041 -45.836,1.029 -45.836,1.029 -29.138,0.742 -29.063,0.76 -29.008,0.813 -28.985,0.887 -28.985,0.887 -28.977,1.137 -28.994,1.212 -29.046,1.269 -29.119,1.292 -29.119,1.292 -45.796,2.171 -45.854,2.163 -45.905,2.132 -45.94,2.084 -45.954,2.027
  Layer 1 region: -47.219,5.416 -47.201,5.472 -47.163,5.516 -47.111,5.543 -47.052,5.547 -47.052,5.547 -28.958,3.321 -28.886,3.292 -28.839,3.232 -28.827,3.156 -28.827,3.156 -28.853,2.906 -28.88,2.835 -28.94,2.786 -29.015,2.773 -29.015,2.773 -46.034,4.257 -46.15,4.244 -46.253,4.188 -46.326,4.096 -46.359,3.984 -46.359,3.984 -46.501,1.624 -46.524,-0.74 -46.524,-0.74 -46.499,-0.855 -46.432,-0.951 -46.334,-1.014 -46.219,-1.035 -46.219,-1.035 -28.839,-0.737 -28.693,-0.696 -28.586,-0.588 -28.545,-0.442 -28.545,-0.442 -28.512,1.438 -28.548,1.586 -28.651,1.697 -28.796,1.743 -28.796,1.743 -45.772,2.628 -45.829,2.642 -45.876,2.678 -45.906,2.729 -45.914,2.788 -45.914,2.788 -45.855,3.629 -45.839,3.686 -45.803,3.733 -45.751,3.762 -45.692,3.768 -45.692,3.768 -27.724,2.191 -27.654,2.166 -27.604,2.111 -27.587,2.039 -27.587,2.039 -27.642,-1.075 -27.661,-1.147 -27.713,-1.2 -27.784,-1.222 -27.784,-1.222 -47.324,-2.252 -47.383,-2.243 -47.433,-2.213 -47.468,-2.166 -47.482,-2.109 -47.482,-2.109 -47.5,1.659 -47.219,5.416
  Layer 1 region: -48.531,7.303 -48.511,7.358 -48.471,7.402 -48.418,7.426 -48.359,7.429 -48.359,7.429 -26.312,3.931 -26.247,3.903 -26.201,3.849 -26.186,3.78 -26.186,3.78 -26.302,-2.864 -26.319,-2.932 -26.367,-2.985 -26.433,-3.01 -26.433,-3.01 -45.533,-5.36 -45.592,-5.356 -45.645,-5.329 -45.683,-5.284 -45.7,-5.227 -45.7,-5.227 -45.789,-4.389 -45.783,-4.33 -45.755,-4.277 -45.709,-4.24 -45.652,-4.223 -45.652,-4.223 -28.868,-2.76 -28.694,-2.709 -28.552,-2.595 -28.464,-2.435 -28.444,-2.254 -28.444,-2.254 -28.421,-2.052 -28.321,-1.874 -28.159,-1.75 -27.962,-1.699 -27.962,-1.699 -27.474,-1.674 -27.332,-1.63 -27.229,-1.523 -27.19,-1.38 -27.19,-1.38 -27.125,2.328 -27.159,2.472 -27.259,2.583 -27.399,2.632 -27.399,2.632 -27.886,2.674 -28.081,2.732 -28.238,2.862 -28.332,3.042 -28.348,3.246 -28.348,3.246 -28.362,3.427 -28.444,3.59 -28.582,3.709 -28.754,3.766 -28.754,3.766 -47.344,6.043 -47.461,6.034 -47.565,5.981 -47.642,5.892 -47.678,5.781 -47.678,5.781 -47.998,1.676 -47.965,-2.441 -47.965,-2.441 -47.937,-2.555 -47.867,-2.649 -47.766,-2.709 -47.65,-2.726 -47.65,-2.726 -29.094,-1.758 -29.019,-1.774 -28.962,-1.825 -28.937,-1.898 -28.937,-1.898 -28.919,-2.148 -28.934,-2.223 -28.984,-2.282 -29.056,-2.308 -29.056,-2.308 -48.759,-4.037 -48.818,-4.031 -48.869,-4.002 -48.906,-3.956 -48.922,-3.9 -48.922,-3.9 -49.047,1.713 -48.531,7.303
  Layer 1 region: -45.224,8.402 -45.371,7.572 -45.369,7.513 -45.345,7.459 -45.302,7.418 -45.247,7.398 -45.247,7.398 -28.751,4.79 -28.675,4.798 -28.612,4.842 -28.58,4.912 -28.58,4.912 -28.536,5.159 -28.543,5.236 -28.586,5.299 -28.655,5.332 -28.655,5.332 -45.048,8.524 -45.107,8.523 -45.162,8.5 -45.203,8.458 -45.224,8.402
  Layer 1 region: -42.489,17.622 -42.805,16.84 -42.816,16.781 -42.804,16.724 -42.77,16.675 -42.72,16.643 -42.72,16.643 -27.127,10.663 -27.051,10.655 -26.98,10.685 -26.934,10.747 -26.934,10.747 -26.84,10.979 -26.831,11.056 -26.86,11.127 -26.921,11.174 -26.921,11.174 -42.291,17.703 -42.349,17.715 -42.407,17.704 -42.457,17.671 -42.489,17.622
  Layer 1 region: -39.623,23.363 -40.045,22.633 -40.064,22.577 -40.06,22.518 -40.033,22.465 -39.988,22.427 -39.988,22.427 -25.379,14.334 -25.304,14.316 -25.231,14.336 -25.176,14.391 -25.176,14.391 -25.051,14.608 -25.031,14.682 -25.05,14.756 -25.104,14.812 -25.103,14.812 -39.416,23.417 -39.472,23.437 -39.531,23.434 -39.584,23.408 -39.623,23.363
  Layer 1 region: -42.519,21.239 -42.483,21.285 -42.432,21.314 -42.374,21.322 -42.317,21.306 -42.317,21.306 -26.076,13.024 -26.018,12.973 -25.994,12.9 -26.009,12.825 -26.009,12.825 -26.119,12.599 -26.169,12.541 -26.241,12.516 -26.317,12.529 -26.317,12.529 -41.802,19.745 -41.916,19.772 -42.031,19.754 -42.131,19.694 -42.201,19.599 -42.201,19.599 -43.142,17.43 -43.971,15.217 -43.971,15.217 -43.987,15.101 -43.957,14.987 -43.887,14.894 -43.785,14.835 -43.785,14.835 -27.352,9.171 -27.201,9.16 -27.063,9.224 -26.974,9.347 -26.974,9.347 -26.3,11.103 -26.284,11.254 -26.343,11.394 -26.463,11.487 -26.463,11.487 -42.113,18.124 -42.162,18.158 -42.194,18.207 -42.204,18.265 -42.191,18.323 -42.191,18.323 -41.848,19.094 -41.814,19.142 -41.764,19.173 -41.705,19.182 -41.648,19.169 -41.648,19.169 -25.303,11.541 -25.245,11.494 -25.217,11.425 -25.226,11.351 -25.226,11.351 -26.342,8.444 -26.385,8.383 -26.452,8.351 -26.526,8.354 -26.526,8.354 -45.241,14.07 -45.292,14.098 -45.329,14.144 -45.346,14.2 -45.34,14.258 -45.34,14.258 -44.068,17.805 -42.519,21.239
  Layer 1 region: -43.106,23.461 -43.068,23.506 -43.016,23.533 -42.958,23.538 -42.902,23.52 -42.902,23.52 -23.381,12.693 -23.329,12.645 -23.305,12.578 -23.314,12.508 -23.314,12.508 -25.695,6.305 -25.735,6.246 -25.798,6.213 -25.868,6.212 -25.868,6.212 -44.62,10.536 -44.674,10.56 -44.714,10.604 -44.735,10.659 -44.732,10.718 -44.732,10.718 -44.528,11.537 -44.503,11.59 -44.459,11.63 -44.403,11.649 -44.344,11.645 -44.344,11.645 -28.071,7.28 -27.89,7.268 -27.717,7.327 -27.58,7.447 -27.5,7.61 -27.5,7.61 -27.409,7.793 -27.254,7.925 -27.06,7.986 -26.857,7.967 -26.857,7.967 -26.39,7.824 -26.241,7.817 -26.108,7.882 -26.022,8.003 -26.022,8.003 -24.693,11.465 -24.676,11.612 -24.732,11.75 -24.846,11.844 -24.846,11.844 -25.289,12.05 -25.453,12.171 -25.557,12.347 -25.583,12.549 -25.529,12.745 -25.529,12.745 -25.479,12.921 -25.5,13.102 -25.589,13.26 -25.732,13.373 -25.732,13.373 -42.422,21.871 -42.535,21.903 -42.651,21.889 -42.753,21.832 -42.826,21.739 -42.826,21.739 -44.53,17.991 -45.908,14.111 -45.908,14.111 -45.92,13.995 -45.886,13.882 -45.812,13.792 -45.709,13.736 -45.709,13.736 -27.941,8.299 -27.876,8.258 -27.839,8.191 -27.841,8.114 -27.841,8.114 -27.91,7.873 -27.949,7.807 -28.016,7.769 -28.093,7.769 -28.093,7.769 -47.199,12.883 -47.252,12.909 -47.291,12.953 -47.31,13.009 -47.305,13.068 -47.305,13.068 -45.503,18.385 -43.106,23.461
  Layer 1 region: -43.078,16.128 -43.367,15.335 -43.376,15.277 -43.361,15.22 -43.326,15.172 -43.275,15.142 -43.275,15.142 -27.483,9.71 -27.406,9.704 -27.337,9.737 -27.293,9.8 -27.293,9.8 -27.207,10.036 -27.2,10.113 -27.232,10.182 -27.294,10.227 -27.294,10.227 -42.884,16.217 -42.942,16.227 -43,16.213 -43.047,16.178 -43.078,16.128
  Layer 1 region: -44.904,9.976 -44.88,10.03 -44.837,10.071 -44.782,10.092 -44.723,10.091 -44.723,10.091 -28.452,6.329 -28.384,6.293 -28.343,6.229 -28.339,6.152 -28.339,6.152 -28.391,5.906 -28.426,5.838 -28.49,5.796 -28.566,5.79 -28.566,5.79 -44.961,8.972 -45.016,8.995 -45.057,9.037 -45.08,9.092 -45.079,9.151 -45.079,9.151
  Layer 1 region: -45.996,0.422 -45.996,-0.422 -45.985,-0.48 -45.952,-0.529 -45.902,-0.561 -45.844,-0.572 -45.844,-0.572 -29.146,-0.275 -29.072,-0.254 -29.018,-0.2 -28.999,-0.125 -28.999,-0.125 -28.999,0.125 -29.018,0.2 -29.072,0.254 -29.146,0.275 -29.146,0.275 -45.844,0.572 -45.902,0.561 -45.952,0.529 -45.985,0.48 -45.996,0.422
  Layer 1 region: 0.422,45.996 -0.422,45.996 -0.48,45.985 -0.529,45.952 -0.561,45.902 -0.572,45.844 -0.572,45.844 -0.273,28.999 -0.305,28.82 -0.404,28.666 -0.553,28.563 -0.731,28.524 -0.731,28.524 -0.93,28.48 -1.096,28.362 -1.203,28.188 -1.233,27.986 -1.233,27.986 -1.164,26.672 -1.191,26.53 -1.283,26.417 -1.416,26.36 -1.416,26.36 -6.799,25.508 -6.943,25.52 -7.065,25.599 -7.136,25.726 -7.136,25.726 -7.476,26.998 -7.567,27.18 -7.722,27.312 -7.916,27.374 -8.119,27.354 -8.119,27.354 -8.3,27.336 -8.474,27.388 -8.615,27.503 -8.702,27.664 -8.702,27.664 -13.623,43.777 -13.651,43.829 -13.697,43.866 -13.754,43.882 -13.813,43.875 -13.813,43.875 -14.615,43.615 -14.666,43.586 -14.703,43.539 -14.718,43.482 -14.71,43.423 -14.71,43.423 -8.184,24.488 -8.147,24.43 -8.088,24.394 -8.019,24.389 -8.019,24.389 0.09,25.673 0.154,25.699 0.199,25.752 0.216,25.819 0.216,25.819 0.572,45.844 0.561,45.902 0.529,45.952 0.48,45.985 0.422,45.996
  Layer 1 region: -12.273,44.331 -13.084,44.098 -13.136,44.071 -13.174,44.026 -13.192,43.969 -13.186,43.91 -13.186,43.91 -8.299,27.941 -8.258,27.876 -8.191,27.839 -8.114,27.841 -8.114,27.841 -7.873,27.91 -7.807,27.949 -7.769,28.016 -7.769,28.093 -7.769,28.093 -12.087,44.225 -12.113,44.278 -12.158,44.317 -12.214,44.336 -12.273,44.331
  Layer 1 region: -2.788,45.914 -3.629,45.855 -3.686,45.839 -3.733,45.803 -3.762,45.751 -3.768,45.692 -3.768,45.692 -2.295,28.909 -2.315,28.728 -2.402,28.568 -2.544,28.454 -2.719,28.404 -2.719,28.404 -2.915,28.346 -3.072,28.216 -3.166,28.035 -3.182,27.832 -3.182,27.832 -3.174,27.763 -3.194,27.612 -3.285,27.491 -3.424,27.43 -3.424,27.43 -5.22,27.146 -5.371,27.161 -5.495,27.248 -5.561,27.385 -5.561,27.385 -5.574,27.453 -5.652,27.642 -5.798,27.784 -5.987,27.859 -6.191,27.854 -6.191,27.854 -6.373,27.848 -6.543,27.913 -6.676,28.037 -6.751,28.203 -6.751,28.203 -10.536,44.62 -10.56,44.674 -10.604,44.714 -10.659,44.735 -10.718,44.732 -10.718,44.732 -11.537,44.528 -11.59,44.503 -11.63,44.459 -11.649,44.403 -11.645,44.344 -11.645,44.344 -6.755,26.113 -6.72,26.05 -6.659,26.01 -6.587,26.004 -6.587,26.004 -1.771,26.766 -1.705,26.795 -1.659,26.851 -1.645,26.922 -1.645,26.922 -2.628,45.772 -2.642,45.829 -2.678,45.876 -2.729,45.906 -2.788,45.914
  Layer 1 region: -9.151,45.079 -9.976,44.904 -10.03,44.88 -10.071,44.837 -10.092,44.782 -10.091,44.723 -10.091,44.723 -6.329,28.452 -6.293,28.384 -6.229,28.343 -6.152,28.339 -6.152,28.339 -5.906,28.391 -5.838,28.426 -5.796,28.49 -5.79,28.566 -5.79,28.566 -8.972,44.961 -8.995,45.016 -9.037,45.057 -9.092,45.08 -9.151,45.079
  Layer 1 region: -6.819,45.49 -6.875,45.47 -6.919,45.431 -6.944,45.377 -6.946,45.318 -6.946,45.318 -4.33,28.827 -4.332,28.768 -4.356,28.715 -4.399,28.675 -4.454,28.655 -4.454,28.655 -4.619,28.629 -4.677,28.631 -4.73,28.656 -4.77,28.699 -4.79,28.754 -4.79,28.754 -7.398,45.247 -7.418,45.302 -7.459,45.345 -7.513,45.369 -7.572,45.371 -7.572,45.371 -8.402,45.224 -8.458,45.203 -8.5,45.162 -8.523,45.107 -8.524,45.048 -8.524,45.048 -5.159,27.765 -5.126,27.696 -5.064,27.653 -4.988,27.645 -4.988,27.645 -3.799,27.833 -3.729,27.864 -3.683,27.925 -3.673,28 -3.673,28 -5.814,45.477 -5.833,45.533 -5.872,45.578 -5.925,45.604 -5.984,45.607 -5.984,45.607
  Layer 1 region: -4.389,45.789 -5.227,45.7 -5.284,45.683 -5.329,45.645 -5.356,45.592 -5.36,45.533 -5.36,45.533 -3.321,28.958 -3.292,28.886 -3.232,28.839 -3.156,28.827 -3.156,28.827 -2.906,28.853 -2.835,28.88 -2.786,28.94 -2.773,29.015 -2.773,29.015 -4.223,45.652 -4.24,45.709 -4.277,45.755 -4.33,45.783 -4.389,45.789
  Layer 1 region: -1.184,45.983 -2.027,45.954 -2.084,45.94 -2.132,45.905 -2.163,45.854 -2.171,45.796 -2.171,45.796 -1.292,29.119 -1.269,29.046 -1.212,28.994 -1.137,28.977 -1.137,28.977 -0.887,28.985 -0.813,29.008 -0.76,29.063 -0.742,29.138 -0.742,29.138 -1.029,45.836 -1.041,45.894 -1.075,45.942 -1.125,45.973 -1.184,45.983
  Layer 1 region: -15.335,43.367 -16.128,43.078 -16.178,43.047 -16.213,43 -16.227,42.942 -16.217,42.884 -16.217,42.884 -10.175,27.157 -10.144,26.977 -10.184,26.8 -10.289,26.651 -10.443,26.554 -10.443,26.554 -10.615,26.444 -10.73,26.276 -10.771,26.077 -10.73,25.877 -10.73,25.877 -10.216,24.666 -10.193,24.522 -10.24,24.385 -10.346,24.286 -10.346,24.286 -15.113,21.644 -15.253,21.606 -15.395,21.639 -15.504,21.734 -15.504,21.734 -16.259,22.812 -16.406,22.953 -16.597,23.024 -16.801,23.015 -16.985,22.928 -16.985,22.928 -17.149,22.848 -17.331,22.838 -17.503,22.898 -17.638,23.019 -17.638,23.019 -27.774,36.477 -27.818,36.517 -27.874,36.536 -27.933,36.532 -27.986,36.505 -27.986,36.505 -28.65,35.986 -28.689,35.941 -28.707,35.885 -28.702,35.826 -28.675,35.773 -28.675,35.773 -16.066,20.212 -16.011,20.17 -15.943,20.157 -15.877,20.175 -15.877,20.175 -8.696,24.156 -8.645,24.202 -8.62,24.267 -8.627,24.336 -8.627,24.336 -15.142,43.275 -15.172,43.326 -15.22,43.361 -15.277,43.376 -15.335,43.367
  Layer 1 region: -26.695,37.46 -27.377,36.964 -27.417,36.92 -27.437,36.865 -27.434,36.806 -27.409,36.752 -27.409,36.752 -17.354,23.418 -17.294,23.37 -17.218,23.359 -17.147,23.387 -17.147,23.387 -16.944,23.534 -16.895,23.594 -16.882,23.669 -16.909,23.742 -16.909,23.742 -26.484,37.424 -26.527,37.465 -26.582,37.486 -26.641,37.484 -26.695,37.46
  Layer 1 region: -18.323,42.191 -19.094,41.848 -19.142,41.814 -19.173,41.764 -19.182,41.705 -19.169,41.648 -19.169,41.648 -12.044,26.381 -12.001,26.204 -12.029,26.024 -12.123,25.868 -12.27,25.761 -12.27,25.761 -12.434,25.639 -12.537,25.464 -12.564,25.262 -12.509,25.065 -12.509,25.065 -12.478,25.003 -12.445,24.855 -12.49,24.71 -12.599,24.605 -12.599,24.605 -14.189,23.723 -14.336,23.686 -14.483,23.725 -14.592,23.831 -14.592,23.831 -14.628,23.891 -14.765,24.041 -14.951,24.126 -15.155,24.131 -15.344,24.056 -15.344,24.056 -15.513,23.989 -15.695,23.991 -15.863,24.063 -15.99,24.194 -15.99,24.194 -25.162,38.326 -25.203,38.368 -25.257,38.391 -25.317,38.391 -25.371,38.369 -25.371,38.369 -26.07,37.897 -26.112,37.855 -26.134,37.8 -26.133,37.741 -26.109,37.687 -26.109,37.687 -15.279,22.228 -15.224,22.18 -15.153,22.164 -15.083,22.183 -15.083,22.183 -10.819,24.546 -10.766,24.596 -10.743,24.664 -10.754,24.736 -10.754,24.736 -18.124,42.113 -18.158,42.162 -18.207,42.194 -18.265,42.204 -18.323,42.191
  Layer 1 region: -24.017,39.231 -24.732,38.784 -24.775,38.743 -24.799,38.689 -24.8,38.63 -24.778,38.575 -24.778,38.575 -15.679,24.571 -15.622,24.52 -15.547,24.503 -15.473,24.526 -15.473,24.526 -15.261,24.659 -15.208,24.715 -15.19,24.789 -15.211,24.863 -15.211,24.863 -23.809,39.181 -23.849,39.224 -23.902,39.249 -23.961,39.251 -24.017,39.231
  Layer 1 region: -21.966,40.414 -22.012,40.377 -22.04,40.325 -22.045,40.266 -22.027,40.209 -22.027,40.209 -13.928,25.607 -13.91,25.552 -13.915,25.493 -13.942,25.441 -13.986,25.404 -13.986,25.404 -14.132,25.323 -14.188,25.305 -14.246,25.31 -14.298,25.337 -14.336,25.381 -14.336,25.381 -22.427,39.988 -22.465,40.033 -22.518,40.06 -22.577,40.064 -22.633,40.045 -22.633,40.045 -23.363,39.623 -23.408,39.584 -23.434,39.531 -23.437,39.472 -23.417,39.416 -23.417,39.416 -14.344,24.326 -14.29,24.273 -14.216,24.253 -14.143,24.272 -14.143,24.272 -13.089,24.856 -13.034,24.908 -13.012,24.981 -13.028,25.055 -13.028,25.055 -21.018,40.746 -21.054,40.792 -21.106,40.821 -21.165,40.827 -21.222,40.81 -21.222,40.81
  Layer 1 region: -19.785,41.526 -20.542,41.156 -20.589,41.121 -20.619,41.069 -20.626,41.01 -20.61,40.954 -20.61,40.954 -13.024,26.076 -12.973,26.018 -12.9,25.994 -12.825,26.009 -12.825,26.009 -12.599,26.119 -12.541,26.169 -12.516,26.241 -12.529,26.317 -12.529,26.317 -19.583,41.455 -19.618,41.502 -19.669,41.533 -19.727,41.541 -19.785,41.526
  Layer 1 region: -16.84,42.805 -17.622,42.489 -17.671,42.457 -17.704,42.407 -17.715,42.349 -17.703,42.291 -17.703,42.291 -11.174,26.921 -11.127,26.86 -11.056,26.831 -10.979,26.84 -10.979,26.84 -10.747,26.934 -10.685,26.98 -10.655,27.051 -10.663,27.127 -10.663,27.127 -16.643,42.72 -16.675,42.77 -16.724,42.804 -16.781,42.816 -16.84,42.805
  Layer 1 lines w1.1: -49.666,-6.98 -45.057,-6.332 ; -49.628,-6.981 ccw(c0.038,-0.001) -44.246,-23.547 ; -44.283,-23.546 -40.174,-21.361 ; -42.533,26.577 -38.587,24.111 ; -42.515,26.544 cw(c0.018,-0.033) -30.86,39.489 ; -30.878,39.522 -28.013,35.855 ; -30.446,-33.813 -34.627,-38.458 cw(c0,0) 10.759,50.619 9.46,44.506 ; -21.361,40.175 -22.065,41.499 cw(c0,0) -6.541,46.543 -6.332,45.058 ; -18.788,-46.502 -17.045,-42.187 ; -18.768,-46.47 ccw(c0.02,0.032) -1.731,-50.091 ; -1.75,-50.123 -1.588,-45.472 ; 24.113,38.651 24.908,39.923 cw(c0.002,0.065) 37.038,29.001 35.857,28.078 ; 40.192,21.328 45.71,24.262 cw(c0.018,-0.033) 51.264,7.169 45.075,6.299 ; 44.506,-9.46 50.643,-10.764 ccw(c0.018,-0.033) 51.76,-0.903 53.492,-0.934
  Layer 2 region: -30.464,34.464 -31.091,33.9 -31.126,33.852 -31.14,33.795 -31.131,33.736 -31.1,33.686 -31.1,33.686 -19.707,21.475 -19.642,21.435 -19.565,21.431 -19.497,21.466 -19.497,21.466 -19.311,21.634 -19.269,21.698 -19.264,21.775 -19.298,21.844 -19.298,21.844 -30.251,34.451 -30.298,34.487 -30.355,34.502 -30.413,34.494 -30.464,34.464
  Layer 2 region: -32.199,39.161 -32.147,39.189 -32.088,39.194 -32.032,39.177 -31.987,39.139 -31.987,39.139 -16.43,19.917 -16.4,19.855 -16.401,19.786 -16.434,19.725 -16.434,19.725 -21.82,13.528 -21.876,13.488 -21.944,13.477 -22.01,13.498 -22.01,13.498 -39.181,23.809 -39.224,23.849 -39.249,23.902 -39.251,23.961 -39.231,24.017 -39.231,24.017 -38.784,24.732 -38.743,24.775 -38.689,24.799 -38.63,24.8 -38.575,24.778 -38.575,24.778 -24.448,15.598 -24.279,15.531 -24.097,15.533 -23.929,15.605 -23.802,15.736 -23.802,15.736 -23.659,15.881 -23.471,15.959 -23.267,15.957 -23.08,15.876 -23.08,15.876 -22.003,15.121 -21.867,15.069 -21.723,15.086 -21.604,15.17 -21.604,15.17 -18.029,19.283 -17.963,19.412 -17.965,19.557 -18.036,19.684 -18.036,19.684 -18.934,20.646 -19.04,20.82 -19.07,21.022 -19.019,21.219 -18.895,21.381 -18.895,21.381 -18.784,21.525 -18.736,21.7 -18.759,21.881 -18.849,22.039 -18.849,22.039 -32.168,37.351 -32.26,37.423 -32.373,37.454 -32.489,37.439 -32.591,37.381 -32.591,37.381 -36.855,33.184 -40.583,28.505 -40.583,28.505 -40.63,28.398 -40.633,28.281 -40.59,28.172 -40.509,28.087 -40.509,28.087 -24.009,16.527 -23.96,16.468 -23.946,16.392 -23.971,16.32 -23.971,16.32 -24.111,16.112 -24.169,16.061 -24.244,16.046 -24.317,16.07 -24.317,16.07 -42.269,27.72 -42.311,27.762 -42.334,27.816 -42.334,27.874 -42.312,27.929 -42.312,27.929 -37.676,33.924 -32.199,39.161